# EAGLE board eTapper1main16 (EAGLE 8.2.2)
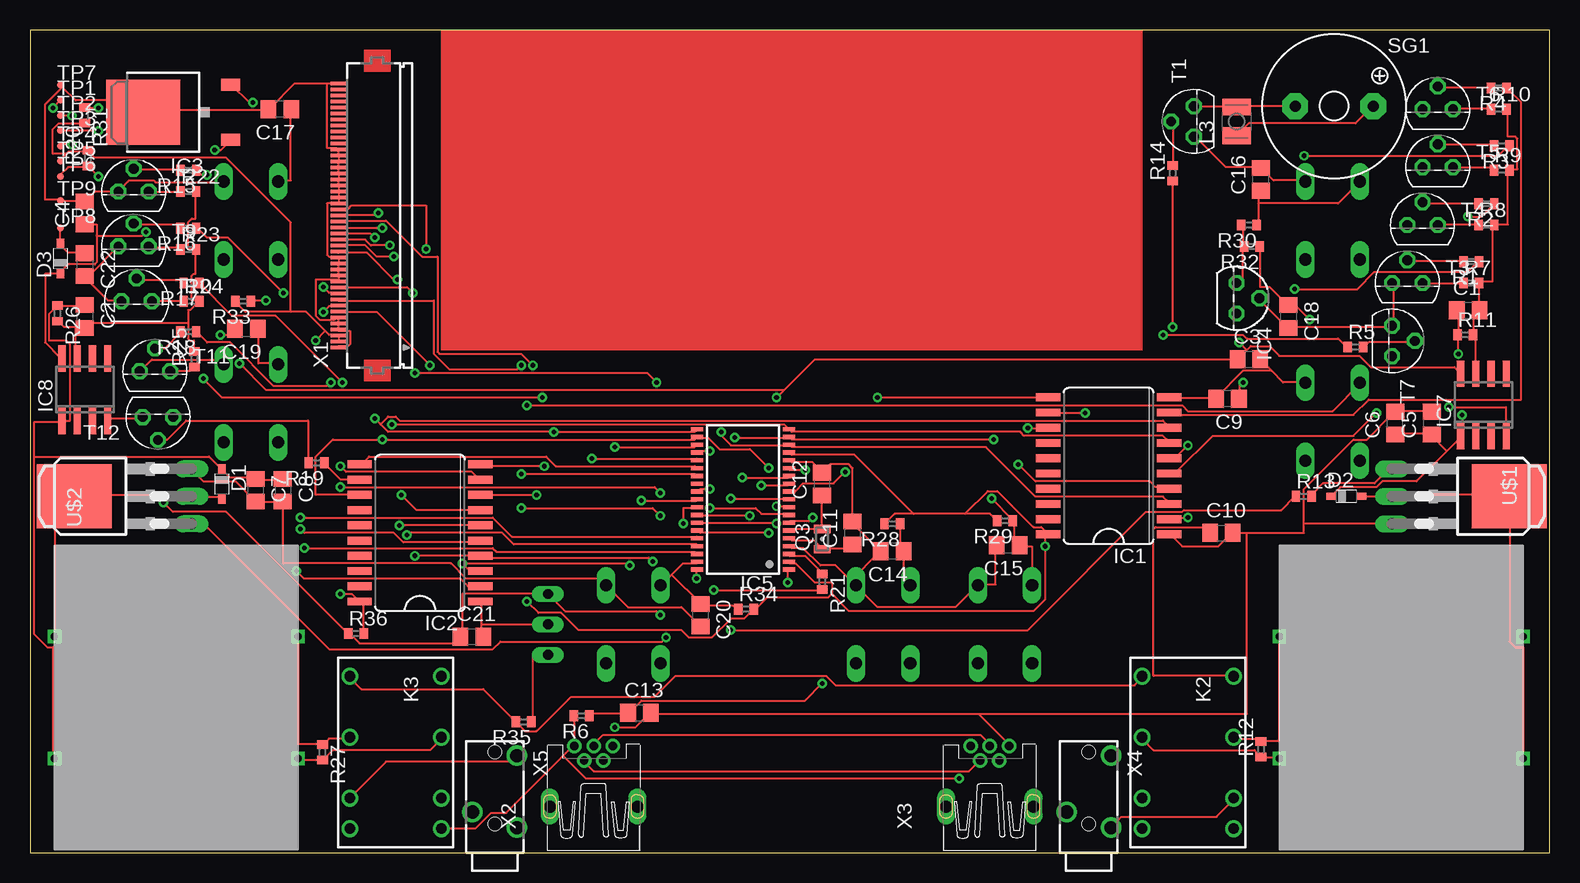
[diagram p0: board, top side]
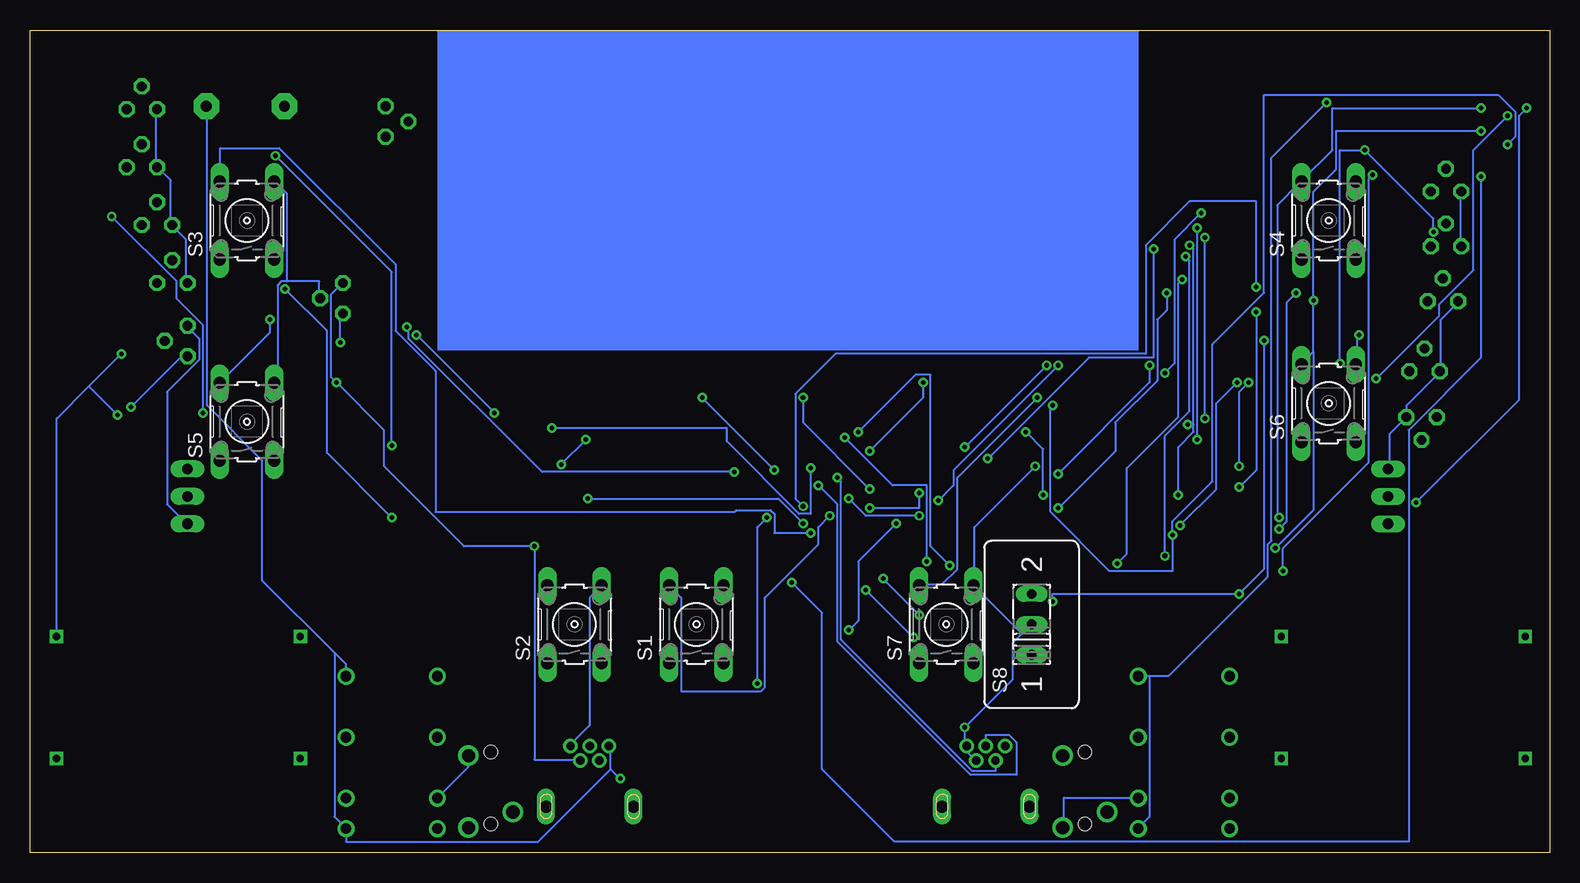
[diagram p1: board, bottom side, seen from below]

Size 126.67 x 68.57 mm. Coordinates in mm from the lower left corner, seen from the top.
Outline: 0,0 126.67,0 126.67,68.57 0,68.57 0,0
Copper layers (1*16): Top 0.035mm / dielectric 1.5mm / Bottom 0.035mm
Design rules "default *": minimum track width 6mil, minimum drill 15mil, track to track 6mil, track to pad 6mil, pad to pad 6mil, via to via 6mil, smd to smd 6mil, copper to edge 6mil, drill to drill 6mil, minimum pad ring 10mil, minimum via ring 8mil, stop-mask expansion 4mil, vias tented up to drill 0mil, thermal gap 15mil

## Footprints (pad centres in the part's own frame; a part is rotated, then mirrored left to right if it is on the bottom)
C0805 = smd 1.3 x 1.5: 1 -0.95,0; 2 0.95,0
SOD323_ST = smd 0.8 x 0.6: A 1.25,0; C -1.25,0
SO20W = smd 0.66 x 2.032: 1 -5.715,-5.029; 2 -4.445,-5.029; 3 -3.175,-5.029; 4 -1.905,-5.029; 5 -0.635,-5.029; 6 0.635,-5.029; 7 1.905,-5.029; 8 3.175,-5.029; 9 4.445,-5.029; 10 5.715,-5.029; 11 5.715,5.029; 12 4.445,5.029; 13 3.175,5.029; 14 1.905,5.029; 15 0.635,5.029; 16 -0.635,5.029; 17 -1.905,5.029; 18 -3.175,5.029; 19 -4.445,5.029; 20 -5.715,5.029
TO252 = smd 1 x 1.6: 1 -2.28,-4.8; 3 2.28,-4.8 | smd 5.4 x 6.2: 2 0,2.5
TO92 = drill 0.813 pad 1.27 octagon: 1 -1.27,0; 2 0,1.905; 3 1.27,0
TSSOP38_R-PDSO-G38-DA = smd 0.35 x 1: 1 -5.85,-3.85; 2 -5.2,-3.85; 3 -4.55,-3.85; 4 -3.9,-3.85; 5 -3.25,-3.85; 6 -2.6,-3.85; 7 -1.95,-3.85; 8 -1.3,-3.85; 9 -0.65,-3.85; 10 0,-3.85; 11 0.65,-3.85; 12 1.3,-3.85; 13 1.95,-3.85; 14 2.6,-3.85; 15 3.25,-3.85; 16 3.9,-3.85; 17 4.55,-3.85; 18 5.2,-3.85; 19 5.85,-3.85; 20 5.85,3.85; 21 5.2,3.85; 22 4.55,3.85; 23 3.9,3.85; 24 3.25,3.85; 25 2.6,3.85; 26 1.95,3.85; 27 1.3,3.85; 28 0.65,3.85; 29 0,3.85; 30 -0.65,3.85; 31 -1.3,3.85; 32 -1.95,3.85; 33 -2.6,3.85; 34 -3.25,3.85; 35 -3.9,3.85; 36 -4.55,3.85; 37 -5.2,3.85; 38 -5.85,3.85
SO08 = smd 0.6 x 2.2: 1 -1.905,-2.6; 2 -0.635,-2.6; 3 0.635,-2.6; 4 1.905,-2.6; 5 1.905,2.6; 6 0.635,2.6; 7 -0.635,2.6; 8 -1.905,2.6
DF2 = drill 0.9: 1 -6.35,-3.81; 3 -1.27,-3.81; 5 3.81,-3.81; 6 6.35,-3.81; 7 6.35,3.81; 8 3.81,3.81; 10 -1.27,3.81; 12 -6.35,3.81
L2825P = smd 1.4 x 2.4: 1 -1.2,0; 2 1.2,0
FC-12M = smd 0.7 x 1.4: 1 -0.85,0; 2 0.85,0
R0402 = smd 0.7 x 0.9: 1 -0.65,0; 2 0.65,0
B3F-10XX = drill 1.016 long: 1 -3.251,2.261; 2 3.251,2.261; 3 -3.251,-2.261; 4 3.251,-2.261
M251 = drill 0.813 long: 1 -2.54,0; 2 0,0; 3 2.54,0
F/QMBIII = drill 0.914 pad 2.159 octagon: + 3.251,0; - -3.251,0
TO92' = drill 0.813 octagon: 1 1.27,0; 2 0,1.905; 3 -1.27,0
TP06R = smd 0.6 x 0.6: TP 0,0
I-PAK_TO251AA = drill 0.889 long: 1 -2.286,-5.334; 2 0,-5.334; 3 2.286,-5.334 | smd 5.334 x 6.223: 4 0,4.445
XFMR = drill 0.6 square: P$1 -10.16,5.08; P$2 -10.16,-5.08; P$3 10.16,5.08; P$4 10.16,-5.08
FH12-45S-0.5SH = smd 0.3 x 1.3: 1 -13,3.25; 2 -12.5,3.25; 3 -12,3.25; 4 -11.5,3.25; 5 -11,3.25; 6 -10.5,3.25; 7 -10,3.25; 8 -9.5,3.25; 9 -9,3.25; 10 -8.5,3.25; 11 -8,3.25; 12 -7.5,3.25; 13 -7,3.25; 14 -6.5,3.25; 15 -6,3.25; 16 -5.5,3.25; 17 -5,3.25; 18 -4.5,3.25; 19 -4,3.25; 20 -3.5,3.25; 21 -3,3.25; 22 -2.5,3.25; 23 -2,3.25; 24 -1.5,3.25; 25 -1,3.25; 26 -0.5,3.25; 27 0,3.25; 28 0.5,3.25; 29 1,3.25; 30 1.5,3.25; 31 2,3.25; 32 2.5,3.25; 33 3,3.25; 34 3.5,3.25; 35 4,3.25; 36 4.5,3.25; 37 5,3.25; 38 5.5,3.25; 39 6,3.25; 40 6.5,3.25; 41 7,3.25; 42 7.5,3.25; 43 8,3.25; 44 8.5,3.25; 45 9,3.25
32005-601 = drill 0.7 pad 1.016: 1 2.825,1.6; 2 1.625,0.8; 3 2.825,0; 4 1.625,-0.8; 5 2.825,-1.6 | drill 1 pad 1.422 long: M1 -2.225,3.65; M2 -2.225,-3.65
1501_03 = drill 1.1 pad 1.7: 1 -1.85,0.3; 2 1.85,-1; 3 -1.85,-5.7 | hole 1.1: 0,0; 0,-6

## Placement (x,y rotation side)
C1  .01uF  [C0805]  119.89,45.21 0 top
C2  .01uF  [C0805]  4.57,44.7 270 top
C3  [C0805]  101.6,41.15 0 top
C4  [C0805]  4.57,53.34 90 top
C5  3.3uF  [C0805]  116.84,35.81 90 top
C6  220uF  [C0805]  113.79,35.81 90 top
C7  220uF  [C0805]  18.8,30.23 270 top
C8  3.3uF  [C0805]  21.08,30.23 270 top
C9  47uF  [C0805]  99.82,37.85 180 top
C10  47uF  [C0805]  99.31,26.67 0 top
C11  12pF  [C0805]  68.58,26.67 90 top
C12  12pF  [C0805]  66.04,30.73 90 top
C13  1 uF  [C0805]  50.8,11.68 0 top
C14  .1uF  [C0805]  71.88,25.15 180 top
C15  .1uF  [C0805]  81.53,25.65 180 top
C16  .1uF  [C0805]  102.62,56.13 90 top
C17  .1uF  [C0805]  20.83,61.98 180 top
C18  .1uF  [C0805]  104.9,44.7 270 top
C19  .1uF  [C0805]  18.03,43.69 180 top
C20  .1uF  [C0805]  55.88,19.81 270 top
C21  .1uF  [C0805]  36.83,18.03 0 top
C22  220uF  [C0805]  4.57,49.02 270 top
D1  BAT60J  [SOD323_ST]  16,30.73 270 top
D2  BAT60J  [SOD323_ST]  109.73,29.72 0 top
D3  BAT60J  [SOD323_ST]  2.54,49.53 90 top
IC1  74AC373DW  [SO20W]  89.92,32.26 90 top
IC2  74AC373DW  [SO20W]  32.51,26.67 90 top
IC3  LM2936DT-5.0  [TO252]  11.94,61.72 90 top
IC4  LM2936Z-3.0  [TO92]  100.58,46.23 270 top
IC5  MSP430F2232IDA  [TSSOP38_R-PDSO-G38-DA]  59.44,29.46 90 top
IC7  LP2951M  [SO08]  121.16,37.34 0 top
IC8  LP2951M  [SO08]  4.57,38.61 0 top
K2  DF2-DC3V  [DF2]  96.52,8.38 270 top
K3  DF2-DC3V  [DF2]  30.48,8.38 270 top
L3  470uH  [L2825P]  100.58,60.96 90 top
Q3  FC-12M  [FC-12M]  66.04,26.16 90 top
R1  47K  [R0402]  120.14,49.28 180 top
R2  47K  [R0402]  121.41,54.1 180 top
R3  47K  [R0402]  122.68,58.93 180 top
R4  [R0402]  122.43,63.75 180 top
R5  47K  [R0402]  110.49,42.16 0 top
R6  47K  [R0402]  45.97,11.43 180 top
R7  1K  [R0402]  120.14,47.5 0 top
R8  3K  [R0402]  121.41,52.32 0 top
R9  6K  [R0402]  122.68,56.9 0 top
R10  12K  [R0402]  122.43,61.98 0 top
R11  3K  [R0402]  119.63,43.18 0 top
R12  51K  [R0402]  102.62,8.64 90 top
R13  1K  [R0402]  106.17,29.72 0 top
R14  1K  [R0402]  95.25,56.64 90 top
R15  47K  [R0402]  13.21,56.9 180 top
R16  47K  [R0402]  13.21,52.07 180 top
R17  47K  [R0402]  13.46,47.5 180 top
R18  47K  [R0402]  13.21,43.43 180 top
R19  47K  [R0402]  23.88,32.51 180 top
R20  47K  [R0402]  4.83,57.91 90 top
R21  1K  [R0402]  66.04,22.61 270 top
R22  1K  [R0402]  13.21,55.12 0 top
R23  3K  [R0402]  13.21,50.29 0 top
R24  6K  [R0402]  13.46,45.97 0 top
R25  12K  [R0402]  13.72,41.15 90 top
R26  3K  [R0402]  2.29,44.96 270 top
R27  51K  [R0402]  24.38,8.38 270 top
R28  47K  [R0402]  71.88,27.43 180 top
R29  47K  [R0402]  81.28,27.69 180 top
R30  47K  [R0402]  101.6,52.32 180 top
R31  47K  [R0402]  4.57,61.47 270 top
R32  47K  [R0402]  101.85,50.55 180 top
R33  47K  [R0402]  17.78,45.97 180 top
R34  47K  [R0402]  59.69,20.32 0 top
R35  100  [R0402]  41.15,10.92 180 top
R36  47K  [R0402]  27.18,18.29 0 top
S1  [B3F-10XX]  71.12,19.05 90 bottom
S2  [B3F-10XX]  81.28,19.05 90 bottom
S3  [B3F-10XX]  108.58,52.7 90 bottom
S4  [B3F-10XX]  18.41,52.7 90 bottom
S5  [B3F-10XX]  108.58,35.94 90 bottom
S6  [B3F-10XX]  18.41,37.47 90 bottom
S7  [B3F-10XX]  50.29,19.05 90 bottom
S8  [M251]  43.18,19.05 90 bottom
SG1  F/QMBIII  [F/QMBIII]  108.71,62.23 0 top
T1  2N3904  [TO92']  97.03,60.96 90 top
T2  2N3904  [TO92']  8.64,55.12 0 top
T3  2N3904  [TO92']  114.81,47.5 0 top
T4  2N3904  [TO92']  116.08,52.32 0 top
T5  2N3904  [TO92']  117.35,57.15 0 top
T6  2N3904  [TO92']  117.35,61.98 0 top
T7  2N3904  [TO92']  113.54,42.67 270 top
T9  2N3904  [TO92']  8.64,50.55 0 top
T10  2N3904  [TO92']  8.89,45.97 0 top
T11  2N3904  [TO92']  10.41,40.13 0 top
T12  2N3904  [TO92']  10.67,36.32 180 top
TP1  TPSTP06R  [TP06R]  2.54,62.74 0 top
TP2  TPSTP06R  [TP06R]  2.54,61.47 0 top
TP3  TPSTP06R  [TP06R]  2.54,60.2 0 top
TP4  TPSTP06R  [TP06R]  2.54,58.93 0 top
TP5  TPSTP06R  [TP06R]  2.54,57.66 0 top
TP6  TPSTP06R  [TP06R]  2.54,56.39 0 top
TP7  TPSTP06R  [TP06R]  2.54,64.01 0 top
TP8  TPSTP06R  [TP06R]  2.54,52.07 0 top
TP9  TPSTP06R  [TP06R]  2.54,54.36 0 top
U$1  IRLR024N  [I-PAK_TO251AA]  118.87,29.72 270 top
U$2  IRLR024N  [I-PAK_TO251AA]  8.13,29.72 90 top
U$3  XFMR  [XFMR]  114.3,12.95 180 top
U$4  XFMR  [XFMR]  12.19,12.95 0 top
X1  FH12-45S-0.5SH  [FH12-45S-0.5SH]  28.96,55.12 90 top
X2  MINI-USB_SHIELD5P2-32005-601  [32005-601]  46.99,6.1 90 top
X3  MINI-USB_SHIELD5P2-32005-601  [32005-601]  80.01,6.1 90 top
X4  1501_03  [1501_03]  88.27,2.41 180 top
X5  1501_03  [1501_03]  38.73,2.41 180 top

## Library data of the parts
C1-C22 L3 = rcl
D1-D3 = diode
IC1 IC2 = 74xx-eu
IC3 = national-semiconductor; MF: NATIONAL SEMICONDUCTOR; MPN: LM2936DT-5.0/NOPB; OC_FARNELL: 1286864; OC_NEWARK: 41K4501
IC4 = national-semiconductor; MF: NATIONAL SEMICONDUCTOR; MPN: LM2936Z-3.0/NOPB; OC_FARNELL: 1312709; OC_NEWARK: 41K4531
IC5 = texas; MPN: MSP430F2232IDA; OC_FARNELL: 1610178; OC_NEWARK: 28M6312
IC7 IC8 = national-semiconductor; MF: FAIRCHILD SEMICONDUCTOR; MPN: LP2951CM; OC_FARNELL: 9488561; OC_NEWARK: 78K6014
K2 K3 = relay; OC_FARNELL: unknown; OC_NEWARK: unknown
Q3 = crystal
R1-R36 = resistor
S1-S7 = switch-omron; MPN: B3F-1000; OC_FARNELL: 176432; OC_NEWARK: 36M3542
S8 = switch
SG1 = buzzer; OC_FARNELL: unknown; OC_NEWARK: unknown
T1-T7 T9-T12 = transistor-neu-to92
TP1-TP9 = testpad
U$1 U$2 = IRLR024N
U$3 U$4 = XFMR
X1 = con-hirose; OC_FARNELL: unknown; OC_NEWARK: unknown
X2 X3 = con-cypressindustries; OC_FARNELL: unknown; OC_NEWARK: unknown
X4 X5 = con-lumberg; OC_FARNELL: 1200127; OC_NEWARK: unknown

## Nets
+3V: C9.1 IC1.20 IC2.20 IC4.1 IC5.2 IC5.16 R20.2 R28.2 R29.2 R30.2 R31.2 R32.2 R33.2 R34.2 R36.2 TP5.TP X1.2 X1.3 X3.4
+9V: C3.1 C4.1 D3.C IC3.1 IC4.3 IC5.28 IC7.8 IC8.8
/LCS: IC5.8 X1.8
/RST: C13.1 IC5.7 R6.1
BAT+: C22.1 D3.A TP8.TP
GND: C3.2 C4.2 C5.2 C6.2 C7.2 C8.2 C9.2 C10.2 C11.2 C12.2 C13.2 C14.2 C15.2 C16.2 C17.2 C18.2 C19.2 C20.2 C21.2 C22.2 IC1.1 IC1.10 IC2.1 IC2.10 IC3.2 IC4.2 IC5.4 IC5.15 S1.4 S2.4 S3.4 S4.4 S5.4 S6.4 S7.4 S8.2 T1.3 T2.3 T3.3 T4.3 T5.3 T6.3 T7.3 T9.3 T10.3 T11.3 T12.3 TP7.TP TP9.TP U$1.3 U$2.3 X1.1 X1.4 X1.5 X1.6 X1.12 X1.13 X1.14 X1.15 X1.16 X1.25 X1.26 X1.27 X1.28 X1.29 X1.30 X1.31 X1.32 X1.33 X1.34 X1.45 X2.4 X2.5 X3.5
IO1_0: C14.1 IC5.31 R28.1 S1.2
IO1_1: C15.1 IC5.32 R29.1 S2.2
IO1_2: C16.1 IC5.33 R30.1 S3.2
IO1_3: C17.1 IC5.34 R31.1 S4.2
IO4_0: IC1.3 IC2.3 IC5.17 X1.17
IO4_1: IC1.4 IC2.4 IC5.18 X1.18
IO4_2: IC1.7 IC2.7 IC5.19 X1.19
IO4_3: IC1.8 IC2.8 IC5.20 X1.20
IO4_4: IC1.13 IC2.13 IC5.21 X1.21
IO4_5: IC5.22 X1.22
IO4_6: IC5.23 X1.23
IO4_7: IC5.24 X1.24
J2_1: K2.3 R12.1 U$3.P$3
J2_3: K2.10 R12.2 U$3.P$4
J3_1: K3.3 R27.1 U$4.P$3
J3_3: K3.10 R27.2 U$4.P$4
LD_/C: IC5.29 X1.9
LEDA: X1.36
LEDK1: X1.37
LEDK2: X1.38
LEDK3: X1.39
LEDK4: X1.40
LHVTRIG: IC5.30 R13.1
LNC1: X1.41
LNC2: X1.42
LNC3: X1.43
LNC4: X1.44
LRD: IC5.10 X1.11
LRESET: IC5.26 X1.7
LSDO: X1.35
LTS+: K2.8 X4.1
LTS-: K2.5 X4.3
LVSEL: IC1.11 IC5.14
LWR: IC5.9 X1.10
N$1: IC1.2 R1.1
N$2: IC1.5 R2.1
N$3: IC1.6 R3.1
N$4: IC1.9 R4.1
N$5: IC1.12 R5.1
N$6: L3.2 SG1.- T1.1
N$7: R4.2 T6.2
N$8: R5.2 T7.2
N$9: D2.A U$1.2 U$1.4 U$3.P$1
N$10: R7.1 T3.1
N$11: R8.1 T4.1
N$12: R9.1 T5.1
N$13: R1.2 T3.2
N$14: R2.2 T4.2
N$15: R3.2 T5.2
N$16: R10.1 T6.1
N$17: C1.2 IC7.7 R7.2 R8.2 R9.2 R10.2 R11.2
N$18: C1.1 C5.1 C6.1 D2.C IC7.1 R11.1 U$3.P$2
N$19: D1.A U$2.2 U$2.4 U$4.P$1
N$20: IC2.2 R15.1
N$21: R13.2 U$1.1
N$22: R14.2 T1.2
N$23: R35.1 S8.1
N$24: IC2.5 R16.1
N$25: IC2.6 R17.1
N$26: IC2.9 R18.1
N$27: IC2.12 R19.1
N$29: R15.2 T2.2
N$30: R16.2 T9.2
N$31: R17.2 T10.2
N$32: R18.2 T11.2
N$33: R19.2 T12.2
N$34: K2.1 K3.1 R35.2
N$35: R22.1 T2.1
N$36: R23.1 T9.1
N$37: R24.1 T10.1
N$38: R25.1 T11.1
N$39: C2.2 IC8.7 R22.2 R23.2 R24.2 R25.2 R26.2
N$40: C2.1 C7.1 C8.1 D1.C IC8.1 R26.1 U$4.P$2
N$42: R21.2 U$2.1
N$45: IC7.4 T7.1
N$47: IC8.4 T12.1
RHVTRIG: IC5.3 R21.1
RTS+: K3.8 X5.1
RTS-: K3.5 X5.3
RVSEL: IC2.11 IC5.25
SCL: IC5.13 X2.2 X3.2
SDA: IC5.12 X2.3 X3.3
SPKR: IC5.11 R14.1
TCK: C18.1 IC5.35 R32.1 S5.2 TP4.TP
TDI: C20.1 IC5.37 R34.1 S7.2 TP2.TP
TDO: C21.1 IC5.38 R36.1 S8.3 TP1.TP
TEST: IC5.1 R20.1 TP6.TP
TMS: C19.1 IC5.36 R33.1 S6.2 TP3.TP
VCC: C10.1 IC3.3 K2.7 K2.12 K3.7 K3.12 L3.1 R6.2 SG1.+ X2.1 X3.1
XIN: C12.1 IC5.6 Q3.2
XOUT: C11.1 IC5.5 Q3.1

## Tracks (layer width: path | path; a pad name or v marks a point on that pad's centre or on a via)
+3V  (via drill 0.38)
  Top 0.152: 3.02,58.26 3.17,58.42 4.76,58.42 R20.2 4.92,58.42 5.4,57.94 16.35,57.94 21.75,52.55 21.75,45.09 | 3.02,58.26 2.54,57.78 TP5.TP | 3.02,58.26 1.91,58.26 1.91,60.33 2.38,60.8 4.45,60.8 R31.2 | R36.2 27.78,18.41 27.78,20.95 IC2.20 27.46,20.95 26.83,21.59 v25.88,21.59 | 21.75,45.09 23.02,45.09 24.61,43.5 | 21.75,45.09 17.94,45.09 17.14,45.88 R33.2 | 24.61,43.5 24.92,43.18 25.56,43.18 X1.3 25.72,43.02 25.72,42.7 X1.2 | 24.61,43.5 v23.81,42.7 | R30.2 100.97,52.23 101.12,52.23 101.12,50.64 R32.2 101.12,50.48 101.12,47.62 100.65,47.62 IC4.1 | v101.12,39.21 100.81,39.21 100.81,37.94 C9.1 | 66.83,21.59 66.52,21.27 61.44,21.27 60.48,20.32 R34.2 60.33,20.32 59.53,19.53 58.42,19.53 56.83,17.94 54.93,17.94 54.29,18.57 45.72,18.57 44.29,20 42.39,20 v41.43,20.95 | 66.83,21.59 66.83,22.54 65.41,22.54 63.82,24.13 63.34,24.13 IC5.2 | 77.95,28.26 80.01,28.26 80.49,27.78 R29.2 | 77.95,28.26 73.66,28.26 | 73.66,28.26 72.07,28.26 71.28,27.46 R28.2 | 73.66,28.26 68.74,33.18 63.5,33.18 63.34,33.34 IC5.16 | 77.95,28.26 79.85,30.16 80.64,30.16 83.66,27.15 84.3,27.15 84.77,26.67 IC1.20 84.77,26.51 84.61,26.51 v84.61,25.56 84.61,21.11 83.66,20.16 68.26,20.16 66.83,21.59
  Bottom 0.152: v23.81,42.7 23.81,23.65 v25.88,21.59 41.43,21.59 v41.43,20.95 | IC4.1 100.65,47.47 101.6,46.51 101.6,39.69 v101.12,39.21 97.16,35.24 97.16,32.23 90.49,25.56 v84.61,25.56 84.61,7.78 80.96,7.78 X3.4
+9V  (via drill 0.38)
  Top 0.152: 5.56,51.44 5.56,52.39 4.6,52.39 C4.1 | 5.56,51.44 5.56,49.21 5.4,49.05 3.17,49.05 2.54,48.42 D3.C 2.54,48.26 1.27,48.26 1.27,42.55 2.54,41.27 IC8.8 | v15.4,58.58 15.88,58.58 16.67,59.37 IC3.1 | v9.68,51.75 9.37,51.44 5.56,51.44 | v56.67,30.32 55.88,30.32 55.72,30.16 IC5.28 | 62.87,38.58 65.41,41.12 100.65,41.12 C3.1 100.81,41.27 101.44,41.91 | 62.87,38.58 v62.23,37.94 | 101.44,41.91 101.76,42.23 103.35,42.23 104.14,41.43 110.81,41.43 111.76,40.48 118.75,40.48 119.22,40.01 IC7.8 | 101.44,41.91 v100.81,42.55 | v17.46,40.8 19.68,38.58 62.87,38.58
  Bottom 0.152: v9.68,51.75 9.68,52.86 v15.4,58.58 17.46,58.58 v17.46,40.8 | v56.67,30.32 62.23,35.88 v62.23,37.94 | v100.81,42.55 100.81,44.77 100.65,44.93 IC4.3
/LCS  (via drill 0.38)
  Top 0.152: v56.67,28.73 60.48,28.73 60.96,28.26 63.18,28.26 IC5.8 | v52.55,30 52.07,30.48 v25.88,30.48 | v24.45,45.09 24.92,45.56 25.56,45.56 X1.8
  Bottom 0.152: v56.67,28.73 52.55,28.73 v52.55,30 | v25.88,30.48 24.45,31.91 v24.45,45.09
/RST  (via drill 0.38)
  Top 0.152: R6.1 46.67,11.43 46.83,11.59 49.85,11.59 C13.1 50.01,11.75 50.96,12.7 64.61,12.7 v66.04,14.13 | v65.25,27.94 64.93,27.62 63.34,27.62 IC5.7
  Bottom 0.152: v65.25,27.94 66.04,27.15 v66.04,14.13
BAT+
  Top 0.152: TP8.TP D3.A 2.54,50.64 3.17,50.01 4.45,50.01 C22.1
GND  (via drill 0.38)
  Top 0.152: 2.7,63.82 3.81,62.71 8.41,62.71 9.37,61.75 IC3.2 9.53,61.75 9.68,61.91 19.84,61.91 C17.2 20,62.07 22.07,64.14 24.77,64.14 | 2.7,63.82 2.54,63.98 TP7.TP 2.7,63.82 | 24.77,64.14 25.56,64.14 X1.45 | X1.1 25.72,42.23 26.51,42.23 26.67,42.39 26.67,43.5 25.72,43.5 X1.4 25.72,43.66 25.72,43.97 X1.5 25.72,44.13 X1.6 25.56,44.61 25.4,44.45 24.13,44.45 23.81,44.77 23.81,47.78 25.72,47.78 | 25.72,47.78 25.72,48.1 X1.13 25.72,48.26 25.72,48.58 X1.14 25.72,48.74 25.72,49.05 X1.15 25.72,49.21 25.72,49.53 X1.16 25.56,49.69 24.92,49.69 24.77,49.85 24.77,54.13 25.56,54.13 X1.25 25.72,54.13 X1.26 | 25.72,47.78 X1.12 | X1.32 25.72,58.1 X1.33 25.72,58.26 25.72,58.58 X1.34 25.56,58.74 24.77,58.74 24.77,64.14 | X1.26 25.72,55.09 X1.27 25.72,55.24 25.72,55.56 X1.28 25.72,55.72 25.72,56.04 X1.29 25.72,56.2 25.72,56.52 X1.30 25.72,56.67 25.72,56.99 X1.31 25.72,57.15 X1.32 | X1.26 | X1.32 | T10.3 7.62,46.04 6.51,46.04 4.6,47.94 C22.2 4.6,48.1 4.92,48.1 T9.3 | S4.4 16.03,55.88 10.48,55.88 10.32,56.04 8.26,56.04 7.46,55.24 T2.3 7.3,55.09 5.4,55.09 4.6,54.29 C4.2 4.45,54.29 2.54,54.29 TP9.TP 2.54,54.45 1.27,54.45 1.27,62.39 2.7,63.82 | v15.88,43.18 16.51,43.18 16.99,43.66 C19.2 | U$2.3 13.49,31.91 14.45,30.96 17.14,30.96 18.73,29.37 C7.2 18.89,29.21 20.95,29.21 C8.2 21.11,29.21 21.11,24.13 35.08,24.13 36.35,22.86 47.47,22.86 47.94,22.38 S7.4 48.1,22.23 49.85,20.48 54.29,20.48 55.88,18.89 C20.2 | S6.4 16.03,40.8 15.72,41.12 10.16,41.12 9.21,40.16 T11.3 | C5.2 116.84,36.83 113.82,36.83 C6.2 113.67,36.67 111.44,34.45 110.33,34.45 106.2,30.32 106.2,27.46
  Top 0.152: IC1.1 95.09,26.51 96.04,25.56 99.06,25.56 100.17,26.67 C10.2 101.44,26.67 | 106.2,27.46 106.2,26.67 101.44,26.67 | 106.2,27.46 113.51,27.46 U$1.3 | S3.4 106.2,56.04 103.66,56.04 102.71,56.99 C16.2 102.55,57.15 99.69,57.15 97.16,59.69 T1.3 | IC1.10 95.09,37.94 98.74,37.94 C9.2 98.9,37.94 101.12,40.16 103.5,40.16 | 103.5,40.16 104.46,39.21 106.2,39.21 S5.4 | 103.5,40.16 102.55,41.12 C3.2 | IC4.2 102.39,46.2 104.78,43.81 C18.2 104.93,43.81 113.51,43.81 T7.3 113.67,43.97 113.67,47.47 T3.3 | 68.42,22.7 68.74,22.38 S1.4 | 68.42,22.7 67.15,23.97 65.88,23.97 64.45,25.4 63.5,25.4 63.34,25.56 IC5.4 | 66.04,31.75 65.25,32.54 63.5,32.54 63.34,32.7 IC5.15 | 66.04,31.75 66.67,32.38 68.26,32.38 68.58,32.07 C11.2 68.58,27.46 70.8,25.24 C14.2 70.8,25.08 68.42,22.7 | 66.04,31.75 C12.2 | 68.42,22.7 S1.4 | C15.2 80.49,25.56 80.49,22.38 79.06,22.38 S2.4 78.9,22.23 77.15,20.48 70.64,20.48 68.9,22.23 S1.4 | v48.74,10.48 50.48,10.48 51.59,11.59 C13.2 51.75,11.59 79.06,11.59 | 37.62,19.05 37.62,20.95 IC2.1 | 37.62,19.05 37.62,18.1 C21.2 | 37.62,19.05 S8.2 | v42.86,32.23 37.78,32.23 37.62,32.38 IC2.10 | 79.06,11.59 81.6,9.05 X3.5 | 101.44,26.67 101.44,11.59 79.06,11.59
  Bottom 0.152: T9.3 7.46,50.64 7.46,55.09 T2.3 | v15.88,43.18 16.03,43.02 16.03,40.8 S6.4 | U$2.3 13.34,32.07 13.34,34.92 T12.3 11.91,36.35 11.91,37.31 9.21,40.01 T11.3 9.05,40.16 9.05,44.45 7.62,45.88 T10.3 | T6.3 116.2,61.91 116.2,57.15 T5.3 116.05,57.15 114.94,56.04 114.94,52.39 T4.3 114.78,52.23 113.67,51.12 113.67,47.62 T3.3 | 105.25,47.62 102.55,47.62 102.55,46.35 IC4.2 | 105.25,47.62 105.73,47.62 106.05,47.31 106.05,39.37 106.2,39.21 S5.4 | 105.25,47.62 105.25,54.93 106.2,55.88 S3.4 | U$1.3 113.67,27.46 115.25,29.05 115.25,38.42 112.55,41.12 112.55,42.86 113.51,43.81 T7.3 | X3.5 81.6,9.05 80.01,10.64 80.01,21.27 79.06,22.23 S2.4 | X2.4 47.94,7.78 48.58,8.41 48.58,8.89 X2.5 48.74,9.05 v48.74,10.48 44.77,14.45 44.77,17.46 43.97,18.26 | S8.2 43.97,18.26 | v42.86,32.23 47.94,27.15 47.94,22.38 S7.4 47.94,22.23 43.97,18.26
IO1_0  (via drill 0.38)
  Top 0.152: R28.1 72.55,27.3 72.55,25.24 72.71,25.24 C14.1 72.87,25.08 72.87,22.38 73.34,22.38 S1.2 | v60.01,28.1 55.72,28.1 IC5.31
  Bottom 0.152: v60.01,28.1 60.96,27.15 60.96,25.72 65.41,21.27 65.41,13.81 65.72,13.49 72.39,13.49 72.39,21.27 73.34,22.23 S1.2
IO1_1  (via drill 0.38)
  Top 0.152: v62.23,27.46 55.72,27.46 IC5.32 | v80.17,29.53 81.92,27.78 R29.1 82.07,27.62 82.07,25.72 82.39,25.72 C15.1 82.55,25.56 83.5,25.56 83.5,22.38 S2.2
  Bottom 0.152: v62.23,27.46 64.29,29.53 v80.17,29.53
IO1_2  (via drill 0.38)
  Top 0.152: 102.39,54.13 102.39,55.09 102.55,55.09 C16.1 | 102.39,54.13 102.39,52.39 R30.1 | v61.59,26.67 55.88,26.67 55.72,26.83 IC5.33 | 102.39,54.13 109.06,54.13 110.81,55.88 S3.2
  Bottom 0.152: v61.59,26.67 64.61,26.67 64.61,28.26 64.93,28.57 67.79,28.57 67.94,28.42 92.87,28.42 92.87,40.16 96.2,43.5 96.2,49.05 105.89,58.74 110.81,58.74 110.81,56.04 S3.2
IO1_3  (via drill 0.38)
  Top 0.152: v5.71,62.07 4.6,62.07 R31.1 | v22.54,27.94 38.58,27.94 40.16,26.35 55.56,26.35 IC5.34 | C17.1 21.75,61.91 21.75,56.04 20.8,56.04 S4.2
  Bottom 0.152: v5.71,62.07 18.1,62.07 18.1,58.58 20.64,56.04 S4.2 20.8,55.88 22.7,53.98 22.7,28.1 v22.54,27.94
IO4_0  (via drill 0.38)
  Top 0.152: IC1.3 94.93,29.21 94.46,29.69 83.82,29.69 79.69,33.81 63.5,33.81 63.34,33.97 IC5.17 63.18,33.97 58.42,33.97 57.63,34.77 v57.63,35.08 | v30.64,47.78 30.32,47.78 28.1,50.01 25.72,50.01 X1.17 | IC2.3 36.67,23.5 v36.04,24.13 49.85,24.13 v50.01,23.97
  Bottom 0.152: v30.64,47.78 30.96,47.47 30.96,36.35 35.24,32.07 35.24,24.92 v36.04,24.13 | v57.63,35.08 52.86,39.85 51.59,39.85 51.59,25.56 v50.01,23.97
IO4_1  (via drill 0.38)
  Top 0.152: v80.33,34.45 63.5,34.45 63.34,34.61 IC5.18 63.18,34.61 v58.74,34.61 | v82.39,32.38 83.82,30.96 93.34,30.96 93.82,30.48 94.93,30.48 IC1.4 | v30.32,49.69 28.89,49.69 27.94,50.64 25.72,50.64 X1.18 | v32.07,24.77 IC2.4 37.62,24.77 37.78,24.61 51.59,24.61 v51.91,24.29
  Bottom 0.152: v82.39,32.38 v80.33,34.45 | v30.32,49.69 30,49.37 30,36.83 32.07,34.77 v32.07,24.77 | v58.74,34.61 54.77,30.64 51.91,30.64 v51.91,24.29
IO4_2  (via drill 0.38)
  Top 0.152: IC1.7 94.93,34.29 94.46,34.77 82.87,34.77 82.55,35.08 63.5,35.08 63.34,35.24 IC5.19 63.18,35.4 62.87,35.72 v30.16,35.72 | v30,50.64 28.42,50.64 27.94,51.12 X1.19 | v30.96,29.84 32.23,28.57 IC2.7
  Bottom 0.152: v30,50.64 29.69,50.32 29.69,35.72 | 29.69,35.72 29.69,35.08 30.96,33.81 v30.96,29.84 | 29.69,35.72 v30.16,35.72
IO4_3  (via drill 0.38)
  Top 0.152: IC2.8 v42.23,29.84 | IC5.20 55.56,35.24 55.4,35.08 v43.66,35.08 29.84,35.08 29.21,35.72 | v28.73,51.28 28.42,51.59 25.72,51.59 X1.20 | 29.21,35.72 v28.73,36.2 | 29.21,35.72 29.84,36.35 30.48,36.35 30.8,36.04 94.46,36.04 94.93,35.56 IC1.8
  Bottom 0.152: v43.66,35.08 42.23,33.66 v42.23,29.84 | v28.73,36.2 v28.73,51.28
IO4_4  (via drill 0.38)
  Top 0.152: IC2.13 23.81,29.84 23.81,33.02 25.24,34.45 v29.37,34.45 55.4,34.45 55.56,34.61 IC5.21 55.72,34.61 56.52,34.61 57.47,33.66 60.01,33.66 v61.59,32.07 | v29.37,52.07 25.72,52.07 X1.21 | v83.19,35.4 84.77,35.4 IC1.13
  Bottom 0.152: v29.37,34.45 v29.37,52.07 | v83.19,35.4 68.58,35.4 68.58,34.29 62.55,28.26 61.59,28.26 v61.59,32.07
IO4_5  (via drill 0.38)
  Top 0.152: v48.74,33.81 55.4,33.81 55.56,33.97 IC5.22 | v41.91,40.64 40.96,41.59 34.13,41.59 33.97,41.75 33.97,49.69 32.7,49.69 29.69,52.7 25.72,52.7 X1.22
  Bottom 0.152: v41.91,40.64 v48.74,33.81
IO4_6  (via drill 0.38)
  Top 0.152: v56.67,33.5 55.72,33.5 IC5.23 | v52.23,39.21 51.44,40.01 v32.07,40.01 | v29.05,53.34 28.89,53.18 25.72,53.18 X1.23
  Bottom 0.152: v56.67,33.5 52.23,37.94 v52.23,39.21 | v32.07,40.01 31.27,40.8 31.27,51.12 v29.05,53.34
IO4_7  (via drill 0.38)
  Top 0.152: v46.83,32.86 55.56,32.86 IC5.24 | v33.02,50.32 33.02,53.98 26.83,53.98 26.51,53.66 25.72,53.66 X1.24
  Bottom 0.152: v46.83,32.86 38.42,41.27 33.02,41.27 v33.02,50.32
J2_1
  Top 0.152: U$3.P$3 104.14,7.94 102.71,7.94 R12.1 102.55,8.1 102.08,8.57 93.66,8.57 92.71,9.53 K2.3
J2_3
  Top 0.152: K2.10 100.33,9.53 102.39,9.53 102.55,9.37 R12.2 102.71,9.37 104.14,9.37 U$3.P$4
J3_1
  Top 0.152: K3.3 26.67,9.53 24.92,9.53 24.45,9.05 R27.1 24.29,9.05 22.38,9.05 22.38,17.94 U$4.P$3
J3_3
  Top 0.152: U$4.P$4 22.38,7.78 24.29,7.78 R27.2 24.45,7.78 25.24,8.57 33.34,8.57 34.29,9.53 K3.10
LD_/C  (via drill 0.38)
  Top 0.152: v50.96,29.37 55.56,29.37 IC5.29 | v40.96,40.64 40.64,40.32 34.92,40.32 33.66,41.59 33.66,46.04 25.72,46.04 X1.9
  Bottom 0.152: v50.96,29.37 49.69,30.64 49.69,31.91 v40.96,40.64
LHVTRIG  (via drill 0.38)
  Top 0.152: v58.42,18.57 83.19,18.57 93.03,28.42 96.04,28.42 96.2,28.57 104.3,28.57 105.41,29.69 R13.1 | v54.45,27.46 54.45,28.73 55.56,28.73 IC5.30
  Bottom 0.152: v58.42,18.57 57.63,19.37 57.63,24.29 v54.45,27.46
LRD  (via drill 0.38)
  Top 0.152: v58.42,29.53 63.18,29.53 IC5.10 | v52.55,28.1 51.91,28.73 v40.96,28.73 | v31.91,46.67 31.43,47.15 25.72,47.15 X1.11
  Bottom 0.152: v58.42,29.53 56.99,28.1 v52.55,28.1 | v40.96,28.73 36.2,33.5 36.2,35.88 32.7,39.37 32.7,44.45 31.91,45.24 v31.91,46.67
LRESET  (via drill 0.38)
  Top 0.152: v40.96,31.59 55.4,31.59 55.56,31.43 IC5.26 | v33.34,40.64 28.89,45.09 25.72,45.09 X1.7
  Bottom 0.152: v40.96,31.59 33.34,39.21 v33.34,40.64
LTS+
  Top 0.152: K2.8 100.33,4.45 98.9,3.02 90.96,3.02 90.17,2.22 X4.1
LTS-
  Bottom 0.152: K2.5 92.71,4.6 90.17,7.14 90.17,8.1 X4.3
LVSEL  (via drill 0.38)
  Top 0.152: v64.61,31.91 63.34,31.91 IC5.14 | v70.64,37.94 84.77,37.94 IC1.11
  Bottom 0.152: v70.64,37.94 v64.61,31.91
LWR  (via drill 0.38)
  Top 0.152: v62.23,28.89 63.18,28.89 IC5.9 | v24.45,47.15 24.92,46.67 25.56,46.67 X1.10
  Bottom 0.152: v62.23,28.89 62.87,29.53 62.87,38.26 59.53,41.59 33.66,41.59 33.66,50.64 30,54.29 24.45,54.29 v24.45,47.15
N$1  (via drill 0.38)
  Top 0.152: v105.41,46.99 110.65,46.99 112.08,48.42 119.86,48.42 120.65,49.21 R1.1 | v96.52,27.94 95.09,27.94 IC1.2
  Bottom 0.152: v105.41,46.99 101.92,43.5 101.92,33.34 v96.52,27.94
N$2  (via drill 0.38)
  Top 0.152: v119.86,53.02 120.97,53.02 121.92,53.98 R2.1 | v112.24,36.67 110.33,34.77 98.58,34.77 95.57,31.75 95.09,31.75 IC1.5
  Bottom 0.152: v119.86,53.02 114.46,47.62 114.46,46.2 112.24,43.97 v112.24,36.67
N$3  (via drill 0.38)
  Top 0.152: v106.2,58.1 122.4,58.1 123.19,58.9 R3.1 | v96.52,33.97 95.57,33.02 95.09,33.02 IC1.6
  Bottom 0.152: v106.2,58.1 96.52,48.42 v96.52,33.97
N$4
  Top 0.152: R4.1 123.19,63.66 124.3,62.55 124.3,37.78 111.6,37.78 110.33,36.51 95.25,36.51 95.09,36.67 IC1.9
N$5  (via drill 0.38)
  Top 0.152: v94.46,43.18 101.12,43.18 101.44,42.86 109.06,42.86 109.7,42.23 R5.1 | v87.95,36.67 84.93,36.67 IC1.12
  Bottom 0.152: v87.95,36.67 v94.46,43.18
N$6
  Top 0.152: T1.1 100.49,62.23 L3.2 100.65,62.23 SG1.-
N$7
  Top 0.152: R4.2 121.76,63.82 117.47,63.82 T6.2
N$8
  Top 0.152: R5.2 111.28,42.23 111.6,42.55 115.41,42.55 T7.2
N$9
  Top 0.152: D2.A 111.12,29.69 113.51,29.69 U$1.2 113.67,29.84 123.19,29.84 U$1.4 123.35,29.69 123.35,17.62 123.83,17.14 124.46,17.14 U$3.P$1
N$10
  Top 0.152: R7.1 119.38,47.47 116.2,47.47 T3.1
N$11
  Top 0.152: R8.1 120.65,52.39 117.47,52.39 T4.1
N$12
  Top 0.152: T5.1 121.76,57.15 121.92,56.99 R9.1
N$13
  Top 0.152: R1.2 119.38,49.37 114.94,49.37 T3.2
N$14
  Top 0.152: R2.2 120.65,54.13 116.2,54.13 T4.2
N$15
  Top 0.152: T5.2 121.92,59.05 R3.2
N$16
  Top 0.152: R10.1 121.76,62.07 118.75,62.07 T6.1
N$17
  Top 0.152: R10.2 123.19,61.91 123.19,59.69 123.83,59.69 123.98,59.53 123.98,56.99 123.35,56.99 R9.2 123.19,56.83 123.19,52.39 122.08,52.39 R8.2 121.92,52.23 121.92,47.62 120.81,47.62 R7.2 120.81,47.47 120.81,45.24 C1.2 120.81,45.09 120.33,45.09 120.33,43.18 | 120.33,43.18 120.49,43.18 120.49,40.01 IC7.7 | 120.33,43.18 R11.2
N$18  (via drill 0.38)
  Top 0.152: C6.1 113.82,34.92 116.84,34.92 C5.1 116.84,34.77 118.11,33.5 | 118.11,33.5 119.22,34.61 IC7.1 119.38,34.77 v119.38,36.51 | 118.11,33.5 115.57,30.96 112.71,30.96 112.24,30.48 109.22,30.48 108.58,29.84 D2.C | 119.06,43.18 119.06,45.09 C1.1 | v119.06,41.59 119.06,43.18 | 119.06,43.18 R11.1
  Bottom 0.152: 121.76,38.89 124.46,36.2 U$3.P$2 | 121.76,38.89 v119.06,41.59 | 121.76,38.89 v119.38,36.51
N$19
  Top 0.152: D1.A 15.88,29.53 15.72,29.69 13.49,29.69 U$2.2 13.34,29.84 3.81,29.84 U$2.4 3.65,29.69 2.06,29.69 2.06,18.1 U$4.P$1
N$20  (via drill 0.38)
  Top 0.152: v14.76,56.52 14.29,56.52 13.97,56.83 R15.1 | v22.23,23.5 22.86,22.86 35.88,22.86 36.51,22.23 IC2.2
  Bottom 0.152: v14.76,56.52 15.08,56.2 15.08,32.54 22.23,25.4 v22.23,23.5
N$21
  Top 0.152: R13.2 106.84,29.84 107.79,30.8 112.08,30.8 113.19,31.91 113.51,31.91 U$1.1
N$22
  Top 0.152: R14.2 95.25,60.96 T1.2
N$23
  Top 0.152: S8.1 41.91,16.51 41.91,10.95 R35.1
N$24  (via drill 0.38)
  Top 0.152: v21.11,46.67 16.51,51.28 14.76,51.28 13.97,52.07 R16.1 | v22.54,26.99 22.86,26.67 30.32,26.67 31.11,25.88 37.31,25.88 37.47,26.04 IC2.5
  Bottom 0.152: v21.11,46.67 21.91,45.88 21.91,27.62 v22.54,26.99
N$25  (via drill 0.38)
  Top 0.152: v26.04,39.21 20.48,44.77 16.83,44.77 14.13,47.47 R17.1 | IC2.6 v30.8,27.3
  Bottom 0.152: v26.04,39.21 27.78,37.47 27.78,30.32 v30.8,27.3
N$26  (via drill 0.38)
  Top 0.152: v25.08,39.21 24.77,38.89 20.32,38.89 16.67,42.55 14.76,42.55 13.97,43.34 R18.1 | v25.88,32.23 26.35,31.75 36.83,31.75 37.47,31.11 IC2.9
  Bottom 0.152: v25.08,39.21 25.88,38.42 v25.88,32.23
N$27
  Top 0.152: IC2.12 25.88,31.11 24.61,32.38 R19.1
N$29
  Top 0.152: R15.2 12.54,56.99 8.73,56.99 T2.2
N$30
  Top 0.152: R16.2 12.54,52.07 12.22,52.39 8.73,52.39 T9.2
N$31
  Top 0.152: R17.2 12.7,47.62 12.54,47.78 8.89,47.78 T10.2
N$32
  Top 0.152: R18.2 12.54,43.34 11.27,42.07 10.48,42.07 T11.2
N$33
  Top 0.152: R19.2 23.18,32.54 23.18,36.04 13.02,36.04 11.43,34.45 10.79,34.45 T12.2
N$34
  Top 0.152: K3.1 26.67,14.61 27.62,13.65 37.78,13.65 40.48,10.95 R35.2 40.64,10.79 41.27,10.16 42.23,10.16 45.09,13.02 52.07,13.02 53.82,14.76 66.36,14.76 67.15,13.97 92.08,13.97 92.71,14.61 K2.1
N$35
  Top 0.152: R22.1 12.54,55.09 10,55.09 T2.1
N$36
  Top 0.152: R23.1 12.54,50.32 12.38,50.48 10,50.48 T9.1
N$37
  Top 0.152: R24.1 12.7,46.04 10.16,46.04 T10.1
N$38
  Top 0.152: R25.1 13.65,40.48 13.34,40.16 11.75,40.16 T11.1
N$39
  Top 0.152: 3.81,43.81 4.45,43.81 C2.2 4.6,43.81 4.92,44.13 13.18,44.13 | 3.81,43.81 2.86,43.81 2.38,44.29 R26.2 | 3.81,43.81 3.81,41.27 IC8.7 | 13.18,44.13 13.18,45.24 13.34,45.24 13.97,45.88 R24.2 13.97,46.04 13.49,46.04 13.49,48.1 13.65,48.26 13.81,48.26 13.81,50.16 R23.2 13.81,50.32 13.18,50.32 13.18,52.55 13.49,52.86 13.81,52.86 13.81,55.09 R22.2 | 13.18,44.13 13.18,42.86 13.34,42.7 13.65,42.7 13.65,41.91 R25.2
N$40
  Top 0.152: C8.1 20.95,31.11 18.89,31.11 C7.1 18.73,31.27 16.67,31.27 16.03,31.91 D1.C 15.88,32.07 14.92,33.02 0.32,33.02 | C2.1 4.45,45.56 2.38,45.56 R26.1 2.22,45.56 1.59,44.93 1.59,42.7 3.02,42.7 3.33,42.39 3.33,36.04 2.7,36.04 IC8.1 2.54,35.88 0.32,35.88 0.32,33.02 | 0.32,33.02 0.32,18.26 1.43,17.14 1.91,17.14 1.91,7.94 U$4.P$2
N$42  (via drill 0.38)
  Top 0.152: v56.99,21.91 66.04,21.91 R21.2 | v53.02,17.94 52.7,17.62 39.21,17.62 38.58,16.99 24.92,16.99 14.61,27.3 13.49,27.3 U$2.1
  Bottom 0.152: v53.02,17.94 v56.99,21.91
N$45  (via drill 0.38)
  Top 0.152: v118.27,37.15 123.03,37.15 123.03,34.77 IC7.4
  Bottom 0.152: v118.27,37.15 114.14,41.27 113.67,41.27 T7.1
N$47
  Top 0.152: IC8.4 6.51,36.04 6.67,36.2 9.37,36.2 T12.1
RHVTRIG
  Top 0.152: R21.1 66.04,23.34 64.61,24.77 63.34,24.77 IC5.3
RTS+
  Bottom 0.152: K3.8 34.29,4.6 40.48,4.6 40.48,2.22 X5.1
RTS-
  Top 0.152: K3.5 26.67,4.6 29.69,7.62 40.01,7.62 40.48,8.1 X5.3
RVSEL
  Top 0.152: IC5.25 55.56,32.07 55.4,32.23 43.81,32.23 43.02,33.02 28.26,33.02 27.62,32.38 IC2.11
SCL  (via drill 0.38)
  Top 0.152: v59.37,31.27 63.18,31.27 IC5.13 | X3.2 79.06,7.62 78.26,6.83 46.99,6.83 46.2,7.62 X2.2
  Bottom 0.152: v59.37,31.27 59.05,30.96 59.05,17.78 48.1,6.83 46.2,6.83 46.2,7.62 X2.2
SDA  (via drill 0.38)
  Top 0.152: v60.96,30.64 63.18,30.64 IC5.12 | X3.3 80.01,9.05 79.22,9.84 47.78,9.84 46.99,9.05 X2.3
  Bottom 0.152: v60.96,30.64 59.37,29.05 59.37,17.62 48.26,6.51 44.45,6.51 44.45,9.21 45.09,9.84 46.99,9.84 X2.3
SPKR  (via drill 0.38)
  Top 0.152: v95.25,43.81 R14.1 | v67.94,31.75 66.99,30.8 64.45,30.8 63.82,30.16 63.34,30.16 IC5.11
  Bottom 0.152: v95.25,43.81 95.09,43.66 95.09,42.86 83.98,31.75 v67.94,31.75
TCK  (via drill 0.38)
  Top 0.152: R32.1 102.55,50.48 102.55,47.15 103.35,47.15 104.78,45.72 C18.1 104.93,45.56 105.57,45.56 v106.68,44.45 | v3.49,59.05 2.54,59.05 TP4.TP | v31.43,26.51 31.59,26.67 39.37,26.67 40.32,25.72 55.56,25.72 IC5.35 | v41.43,37.31 96.04,37.31 96.52,36.83 108.58,36.83 110.81,39.05 S5.2
  Bottom 0.152: v106.68,44.45 106.68,43.34 110.81,39.21 S5.2 | v3.49,59.05 2.86,59.69 2.86,61.75 4.29,63.18 23.81,63.18 23.81,46.67 28.1,42.39 28.1,30.96 31.43,27.62 v31.43,26.51 31.43,23.5 36.67,23.5 41.59,28.42 41.59,37.15 v41.43,37.31
TDI  (via drill 0.38)
  Top 0.152: R34.1 58.9,20.32 58.58,20.64 55.88,20.64 C20.1 55.88,20.8 53.5,23.18 | v3.49,61.44 2.54,61.44 TP2.TP | v14.45,39.53 16.03,37.94 v42.7,37.94 | 53.5,23.18 52.7,22.38 S7.2 | 53.5,23.18 54.45,24.13 55.56,24.13 IC5.37
  Bottom 0.152: v3.49,61.44 6.35,58.58 6.35,48.58 9.21,45.72 9.21,44.77 v14.45,39.53 | v42.7,37.94 49.37,31.27 49.37,23.65 50.64,22.38 52.55,22.38 S7.2
TDO  (via drill 0.38)
  Top 0.152: v55.56,22.86 55.56,23.5 IC5.38 | v52.55,19.84 52.23,20.16 44.61,20.16 S8.3 36.04,21.59 36.04,18.1 C21.1 35.88,17.94 35.4,17.46 27.46,17.46 26.67,18.26 R36.1 26.51,18.41 26.35,18.41 16.35,28.42 11.91,28.42 v11.11,29.21 | v1.91,62.07 2.54,62.71 TP1.TP
  Bottom 0.152: v52.55,19.84 v55.56,22.86 | v1.91,62.07 2.54,61.44 2.54,37.78 v11.11,29.21
TEST  (via drill 0.38)
  Top 0.152: TP6.TP 2.54,56.52 3.17,57.15 4.76,57.15 R20.1 4.92,57.15 v5.71,56.36 | v63.18,22.54 63.18,23.5 IC5.1
  Bottom 0.152: v63.18,22.54 60.64,20 60.64,6.99 54.61,0.95 11.75,0.95 11.75,35.24 5.71,41.27 v5.71,56.36
TMS  (via drill 0.38)
  Top 0.152: v5.71,60.17 2.54,60.17 TP3.TP | v19.68,46.04 18.57,46.04 R33.1 | v22.86,25.4 38.58,25.4 38.89,25.08 55.4,25.08 55.56,24.92 IC5.36 | C19.1 19.05,43.66 19.05,40.8 20.64,40.8 S6.2
  Bottom 0.152: v5.71,60.17 17.78,60.17 17.78,56.99 19.68,55.09 v19.68,46.04 19.68,41.75 | 19.68,41.75 20.64,40.8 S6.2 | v22.86,25.4 19.68,28.57 19.68,41.75
VCC  (via drill 0.38)
  Top 0.152: R6.2 45.4,11.43 45.4,9.05 X2.1 45.24,8.89 44.45,8.1 | v18.57,62.55 18.26,62.55 16.83,63.98 IC3.3 | 44.45,8.1 39.69,3.33 38.42,3.33 37.15,2.06 34.29,2.06 K3.7 | L3.1 100.65,59.85 101.6,60.8 110.49,60.8 111.92,62.23 SG1.+ | C10.1 98.27,26.67 97.79,27.15 93.82,27.15 93.66,26.99 93.66,14.76 100.33,14.76 K2.12 | 44.45,8.1 46.35,6.19 v77.47,6.19
  Bottom 0.152: v18.57,62.55 23.18,57.94 23.18,26.04 23.5,25.72 23.5,23.02 31.75,14.76 33.34,14.76 | 33.34,14.76 34.29,14.76 K3.12 | 33.34,14.76 33.34,3.02 34.29,2.06 K3.7 | 78.26,6.99 78.26,8.89 X3.1 | 78.26,6.99 84.3,0.95 100.33,0.95 K2.7 100.33,2.06 101.28,3.02 101.28,16.67 | 101.28,16.67 100.33,15.72 K2.12 | 101.28,16.67 107.31,22.7 107.31,32.7 111.92,37.31 111.92,62.23 SG1.+ | 78.26,6.99 v77.47,6.19
XIN
  Top 0.152: IC5.6 63.34,26.99 66.04,26.99 Q3.2 C12.1
XOUT
  Top 0.152: 66.04,25.4 65.41,26.04 63.5,26.04 63.34,26.19 IC5.5 | 66.04,25.4 68.26,25.4 C11.1 | 66.04,25.4 Q3.1
(copper drawn outside any net)
  shapes: Bottom area x1, Top area x1